# Altium PCB DriverChip.PcbDoc
Units mil, origin at the board's own origin, x right, y up, seen from the top; angles counter-clockwise.
Board outline 390 x 410 mil, 2 copper layers (Top Layer, Bottom Layer); 9 components, 8 nets, 33 pads, 5 vias.
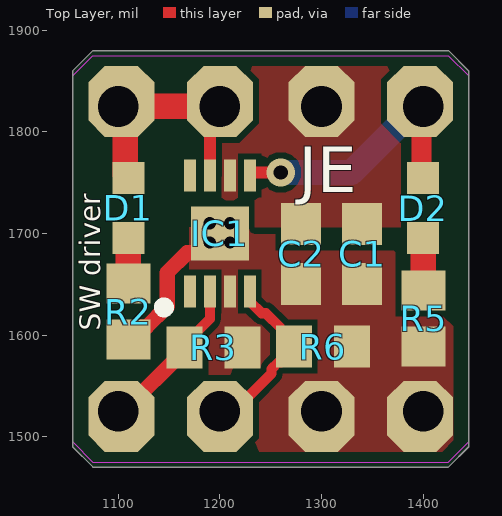
[diagram p0: Top Layer view]
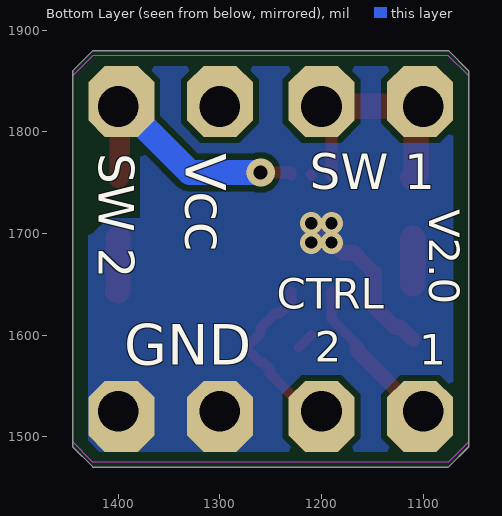
[diagram p1: Bottom Layer view, seen from below]

## Layer stack, top to bottom
Top Solder: solder mask 0.4, Solder Resist, Dk 3.5
Top Layer: signal copper 1.4
Dielectric 1: dielectric 12.6, FR-4, Dk 4.8
Bottom Layer: signal copper 1.4
Bottom Solder: solder mask 0.4, Solder Resist, Dk 3.5

## Board outline
1055,1490 1055,1860 1075,1880 1425,1880 1445,1860 1445,1490 1425,1470 1075,1470

## Design rules (kind name [scope] priority, off if disabled: settings)
BoardOutlineClearance [All] p1: gap=15 ignorepadtopadclearanceinfootprint=FALSE
Clearance [All] p1: gap=6 ignorepadtopadclearanceinfootprint=FALSE except(0: Arc-Hole Track-Hole SMDPad-Hole THPad-Hole Via-Hole Fill-Hole Poly-Hole Region-Hole Text-Hole)
ComponentClearance [All] p1: gap=1 collisioncheckmode=3 verticalgap=1 showdistances=FALSE
DiffPairsRouting [All] p1: maxlimit=393.7 minlimit=6 mostfreqgap=8 toplayer_minwidth=6 toplayer_maxwidth=15 toplayer_prefwidth=8 bottomlayer_minwidth=6 bottomlayer_maxwidth=15 bottomlayer_prefwidth=8 maxuncoupledlength=500
HoleSize [All] p1: absolutevalues=TRUE maxlimit=265 minlimit=13 maxpercent=80.000 minpercent=20.000
HoleToHoleClearance [All] p1: gap=10 allowstackedmicrovias=FALSE
MinimumAnnularRing [All] p1: minimumring=7
MinimumSolderMaskSliver [All] p1: minsoldermaskwidth=0
PlaneClearance [All] p1: clearance=10
PlaneConnect [All] p1: planeconnectstyle=Direct reliefexpansion=16 reliefentries=4 reliefconductorwidth=6 reliefairgap=6
PolygonConnect [All] p1: connectstyle=Direct reliefconductorwidth=8 reliefentries=4 polygonreliefangle="90 Angle" airgapwidth=6
RoutingCorners [All] p1: cornerstyle=45-Degree minsetback=49.21 maxsetback=49.21
RoutingVias [All] p1: holewidth=15 width=30 viastyle="Through Hole" minholewidth=12 minwidth=22 maxholewidth=100 maxwidth=114
SilkToSilkClearance [All] p1: silktosilkclearance=0
SilkToSolderMaskClearance [IsPad] p1: minsilkscreentomaskgap=6 clearancetoexposedcopper=TRUE
SolderMaskExpansion [All] p1: expansion=2.95 istentingtop=FALSE
Width [All] p1: maxlimit=400 minlimit=6 preferedwidth=8
20 further rules are at their usual default settings.

## Components (designator, comment, footprint, x,y, rotation, side; value= is the part's Value field where it differs from the comment)
C1 "C0603C105K3PAC7867" CAPC1608X90X35NL15T15 1340,1680 r90 top
C2 "C0603C105K3PAC7867" CAPC1608X90X35NL15T15 1280,1680 r90 top
D1 "LTST-C191TBKT" FP-LTST-C191TBKT-MFG 1110,1725 r90 top
D2 "LTST-C191TBKT" FP-LTST-C191TBKT-MFG 1400,1725 r90 top
IC1 "MCP14A0304T-E_MNY" SON50P300X200X80-9N-D 1200,1700 r90 top
R2 "ERA3AEB242V" RESC1608X55X30ML20T20 1110,1623.09 r90 top
R3 "ERJ-3EKF1003V" RESC1608X55X30ML15T15 1193.62,1587.77 r0 top
R5 "ERA3AEB242V" RESC1608X55X30ML20T20 1400.48,1616.08 r90 top
R6 "ERJ-3EKF1003V" RESC1608X55X30ML15T15 1301.39,1588.68 r0 top

## Footprints (in the part's own frame and the unit in brackets; to place one, negate y for a bottom-side part, rotate by r counter-clockwise, add the part's x,y. Pads: shape width x height; smd on the part's side, far side on the other; paste and mask are expansions set on the pad)
CAPC1608X90X35NL15T15 [mm] "Chip Capacitor, 2-Leads, Body 1.60x0.81mm, IPC Medium Density"
  rect 1.05x1 smd: 1(-0.75,0) 2(0.75,0)
  body extent -0.88,-0.48 0.87,0.48, height 0.9
FP-LTST-C191TBKT-MFG [mm]
  rect 0.8x0.8 smd paste+0 mask+0: 1(-0.75,0) 2(0.75,0)
  body extent -1.25,-0.55 1.25,0.55, height 0.25
RESC1608X55X30ML15T15 [mm] "Chip Resistor, 2-Leads, Body 1.60x0.80mm, IPC Low Density"
  rect 0.9x1.05 smd: 1(-0.725,0) 2(0.725,0)
  body extent -0.87,-0.48 0.87,0.48, height 0.55
RESC1608X55X30ML20T20 [mm] "Chip Resistor, 2-Leads, Body 1.60x0.80mm, IPC Low Density"
  rect 1x1.1 smd: 1(-0.7,0) 2(0.7,0)
  body extent -0.9,-0.5 0.9,0.5, height 0.55
SON50P300X200X80-9N-D [mm]
  rect 0.8x0.3 smd: 1(-1.45,0.75) 2(-1.45,0.25) 3(-1.45,-0.25) 4(-1.45,-0.75) 5(1.45,-0.75) 6(1.45,-0.25) 7(1.45,0.25) 8(1.45,0.75)
  rect 1.35x1.45 smd: 9(0,0)
  silkscreen extent -1.97,1.27 -1.73,1.52, body extent -1.55,-1 1.55,1, height 0.8

## Part data
C1 C2: library part CMP-2006-02216-2, Manufacturer=Kemet, Part Number=C0603C105K3PAC7867
D1 D2: library part CMP-22017-000008-1, "LED BLUE CLEAR CHIP SMD", Case Code (Imperial)=0603, Case Code (Metric)=1608, Color=Blue, Forward Current=20mA, Forward Voltage=3.8V, Lens Color=Colorless, Max Operating Temperature=80°C, Max Power Dissipation=75mW, Min Operating Temperature=-20°C, Package Quantity=1, Power Dissipation=76mW, Reverse Voltage=5V, Case/Package=0603, Depth=1.6mm, Dominant Wavelength=475nm, Height=0.55mm, Illumination Color=Blue, Lead Free="Lead Free", Length=0.8mm, Lens Style=Diffused, Lens Transparency=Clear, Luminous Intensity=180mcd, Mount="Surface Mount", Number of Elements=1, Number of LEDs=1, Number of Pins=2, Packaging="Tape and Reel", Radiation Hardening=No, Test Current=20mA, Viewing Angle=130°, Wavelength=468nm, Width=0.8mm
IC1: "Integrated Circuit", Manufacturer_Name=Microchip, Manufacturer_Part_Number=MCP14A0304T-E/MNY, Mouser Part Number=579-MCP14A0304T-E/MN, Datasheet Link=https://componentsearchengine.com/Datasheets/1/MCP14A0304T-E_MNY.pdf, Height=0.8mm, Mouser Price/Stock=https://www.mouser.co.uk/ProductDetail/Microchip-Technology/MCP14A0304T-E-MNY?qs=w%2Fv1CP2dgqr6wcJcG4624Q%3D%3D
R2 R5: library part CMP-2000-00965-1, Manufacturer=Panasonic, Part Number=ERA3AEB242V
R3 R6: library part CMP-2000-00182-1, Manufacturer=Panasonic, Part Number=ERJ-3EKF1003V

## Free pads (board coordinates)
  oct 65x70 hole 40 copper offset 3,5: 56(1100,1825)
  oct 65x70 hole 40 copper offset 0,5: 57(1200,1825) 58(1300,1825)
  oct 65x70 hole 40 copper offset -3,5: 59(1400,1825)
  oct 65x70 hole 40 copper offset 3,-5: 60(1100,1525)
  oct 65x70 hole 40 copper offset 0,-5: 61(1200,1525) 62(1300,1525)
  oct 65x70 hole 40 copper offset -3,-5: 63(1400,1525)

## Via types
v1: diameter 22, hole 12, Top Layer to Bottom Layer, 4 vias
v2: diameter 28, hole 14, Top Layer to Bottom Layer, tented both sides, 1 vias

## Nets (pads, with @x,y where several pads share a name; then routed paths per layer and width w, separated by ;. In a path a pad name is that pad's centre, name@x,y a point inside that pad or via, vN(x,y) a via of type N, cw(c..) or ccw(c..) an arc to the next point about the centre after c; other vN are vias at no path point)
Ctrl1: IC1.2 pad.60 R3.1 | length 158.4
  Top Layer w10: R3.1 1165.08,1590.72 1190.17,1615.81 IC1.2
  Top Layer w15: pad.60 1105.27,1525 1165.08,1584.81 R3.1
Ctrl2: IC1.4 pad.61 R6.1 | length 178.1
  Top Layer w10: pad.61 1213.55,1525 1250.88,1562.34 1250.88,1566.72 1257.18,1573.01 1260.13,1573.01 1272.85,1585.73 R6.1 1260.13,1601.4 1260.13,1606.58 1245.27,1621.44 1241.16,1621.44 1229.53,1633.07 IC1.4
GND: C1.1 C2.1 IC1.3 IC1.9 pad.62 pad.63 R2.1 R3.2 R5.1 R6.2 | length 170.8
  Top Layer w10: R3.2@1209.84,1600.09 R3.2
  Top Layer w15: R2.1 1122.19,1607.71 1127.55,1607.71 1148.11,1628.27 1148.11,1661.3 1167.74,1680.93 1178.96,1680.93 IC1.9@1188.53,1690.5 ; IC1.9@1188.03,1690 1190,1690 IC1.9
  other v1: 1190,1691 1210,1691 1190,1710 1210,1710
NetD1_1: D1.1 R2.2 | length 44.8
  Top Layer w25: R2.2 D1.1
NetD2_1: D2.1 R5.2 | length 52
  Top Layer w25: D2.1 1400.24,1695.23 1400.24,1643.88 R5.2
Out1: D1.2 IC1.7 pad.56 pad.57 | length 236.8
  Top Layer w10: pad.57@1190.16,1815.16 pad.57
  Top Layer w12: IC1.7 pad.57@1190.16,1815.16
  Top Layer w25: D1.2 1106.75,1757.78 1106.75,1818.25 pad.56 pad.57@1190.16,1825
Out2: D2.2 IC1.5 pad.59 | length 271.5
  Top Layer w10: IC1.5 1229.53,1759.09 IC1.5@1230.43,1760
  Top Layer w12: IC1.5@1230.43,1760 v2(1260,1760)
  Top Layer w20: D2.2 1398.5,1756.03 1398.5,1823.5 pad.59
  Bottom Layer w10: pad.59@1394.5,1825 pad.59
  Bottom Layer w25: v2(1260,1760) 1329.5,1760 pad.59@1394.5,1825
VCC: C1.2 C2.2 IC1.6 pad.58 | length 3.8
  Top Layer w10: IC1.6 IC1.6@1210.75,1757.99 ; pad.58@1297.5,1825 pad.58
pads on no net: IC1.1 IC1.8

## Polygon pours and split planes (outlines as drawn)
VCC on Top Layer "VCC_L01_P007" (solid, remove dead copper, pour order 7): 1060,1860 1080,1880 1420,1880 1440,1860 1440,1705.91 1060,1705.91
GND on Top Layer "GND_L01_P008" (solid, remove dead copper, pour order 8): 1170,1705.91 1440,1705.91 1440,1500 1420,1480 1170,1480
GND on Bottom Layer "GND_L02_P009" (solid, pour order 9): 1060,1860 1080,1880 1420,1880 1440,1860 1440,1500 1420,1480 1080,1480 1060,1500

## Keep-outs
Keep-Out Layer:
  lines w1: 1055,1495 1075,1475 1425,1475 1445,1495 1445,1855 1425,1875 1075,1875 1055,1855 1055,1495

## Other copper
Top Layer:
  pour cut-out: 1365.68,1682.86 1365.68,1699.42 1378.25,1699.42 1380.58,1697.09 1380.58,1683.1
  pour cut-out: 1212.74,1567.51 1248.58,1568.58 1233.78,1553.78 1226.47,1553.78
Multi-Layer:
  pour cut-out: 1378.25,1789.52 1378.25,1715 1410,1715 1425,1700 1435,1710 1435,1805
  pour cut-out: 1410,1790 1410,1775 1420,1775

## Silkscreen, mask and mechanical layers (free items; w line width, h text height)
Top Overlay:
  text "JE" at 1277.62,1740.4 h45
  text "SW driver" at 1082.17,1603.99 h20 r90
Bottom Overlay:
  text "Vcc" at 1333.43,1778.84 h40 r90
  text "SW 2" at 1419,1779 h35 r90
  text "SW 1" at 1211.62,1743.57 h35
  text "V2.0" at 1094,1724 h30 r90
  text "CTRL" at 1244,1626 h30
  text "2" at 1206.74,1573.51 h30
  text "1" at 1104,1571 h30
  text "GND" at 1394,1571 h40